# Altium PCB cree.PcbDoc
Units mil, origin at the board's own origin, x right, y up, seen from the top; angles counter-clockwise.
Board outline 1000 x 1000 mil, 2 copper layers (Top Layer, Bottom Layer); 16 components, 8 nets, 42 pads, 0 vias.
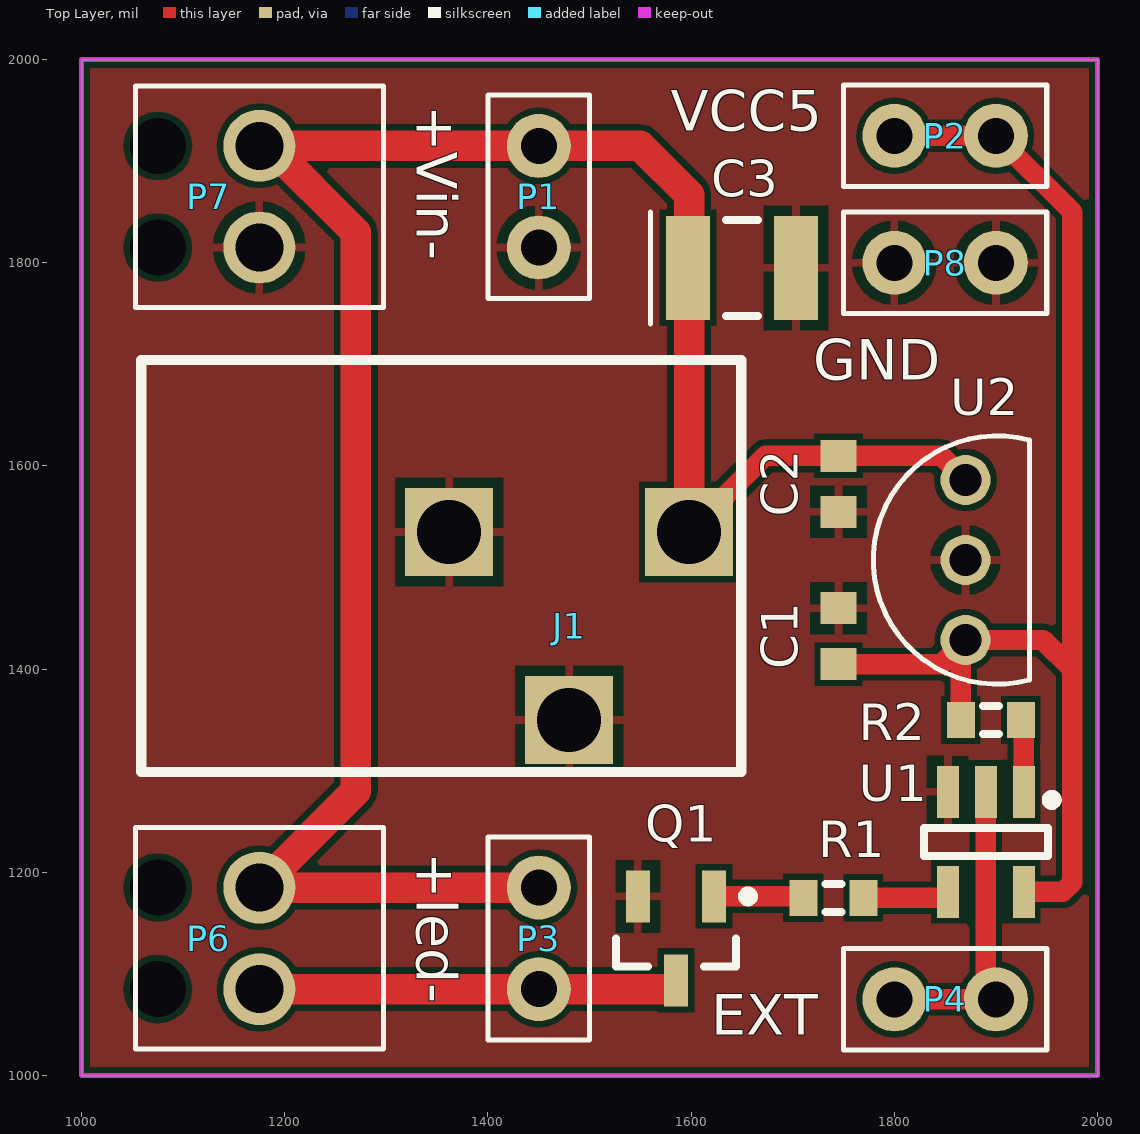
[diagram p0: Top Layer view]
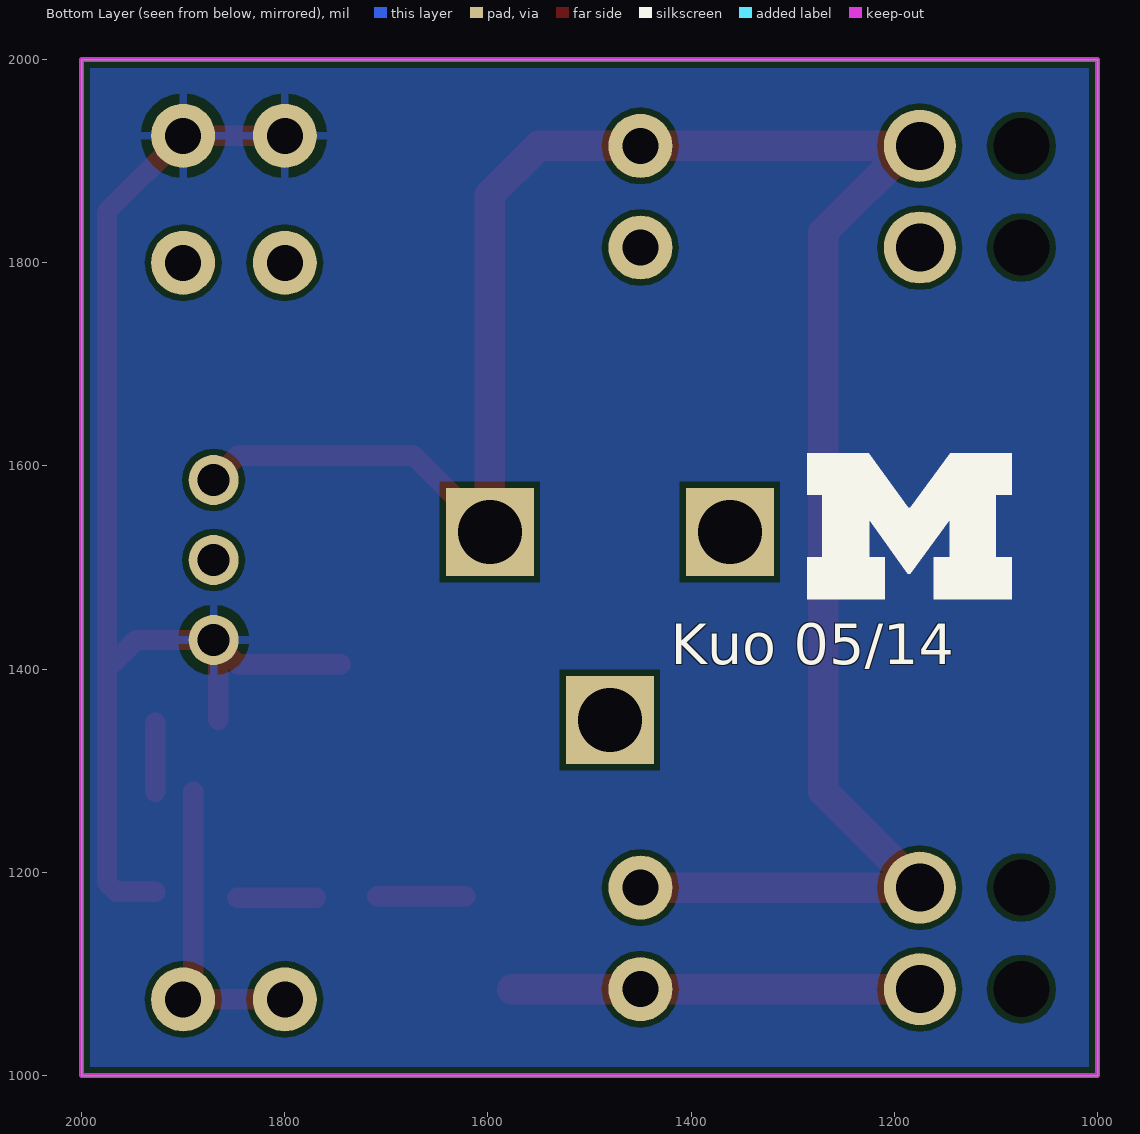
[diagram p1: Bottom Layer view, seen from below]

## Layer stack, top to bottom
Top Solder: solder mask 0.4, Solder Resist, Dk 3.5
Top Layer: signal copper 1.4
Dielectric 1: dielectric 12.6, FR-4, Dk 4.8
Bottom Layer: signal copper 1.4
Bottom Solder: solder mask 0.4, Solder Resist, Dk 3.5

## Board outline
1000,1000 1000,2000 2000,2000 2000,1000

## Design rules (kind name [scope] priority, off if disabled: settings)
Clearance "Clearance~Sunstone Circuits" [All] p1: gap=6 // Sunstone Circuits Minimum Clearance Rule (Double Sided)
HoleSize "HoleSize~Sunstone Circuits" [All] p1: absolutevalues=TRUE maxlimit=251 minlimit=16 maxpercent=80.000 minpercent=20.000 // SSC Hole Size Rule For Single Sided & Double Sided Designs.
HoleSize Testpoint [All] p2: absolutevalues=TRUE maxlimit=100 minlimit=1 maxpercent=80.000 minpercent=20.000
HoleSize TestPointUsage [All] p3: absolutevalues=TRUE maxlimit=100 minlimit=1 maxpercent=80.000 minpercent=20.000
MinimumAnnularRing "MinimumAnnularRing~Sunstone Circuits" [All] p1: minimumring=7 // Sunstone Circuits Minimum Annular Ring (Double Sided)
PlaneClearance "PlaneClearance~Sunstone Circuits" [All] p1: clearance=12 // Sunstone Circuits Power Plane Clearance Rule (Double Sided)
PlaneConnect "PlaneConnect~Sunstone Circuits" [All] p1: planeconnectstyle=Relief reliefexpansion=10 reliefentries=4 reliefconductorwidth=8 reliefairgap=10 // Sunstone Circuits Power Plane Connect Rule (Double Sided)
PolygonConnect "PolygonConnect~Sunstone Circuits" [All] p1: connectstyle=Relief reliefconductorwidth=8 reliefentries=4 polygonreliefangle="90 Angle" airgapwidth=10 // Sunstone Circuits Polygon Connect Style (Double Sided)
RoomDefinition cree_module [InComponentClass('cree_module')] p1: confinementstyle=ConfineIn formatcopy=TRUE lockcomponents=FALSE outline 1037.44,1013.44 1037.44,1986.56 1737.5,1986.56 1737.5,1987.5 1962.5,1987.5 1962.5,1320.71 1974.8,1320.71 1974.8,1139.29 1962.5,1139.29 1962.5,1012.5 1737.5,1012.5 1737.5,1013.44
RoutingVias "RoutingVias~Sunstone Circuits" [All] p1: holewidth=16 width=30 viastyle="Through Hole" minholewidth=16 minwidth=30 maxholewidth=20 maxwidth=40 // Sunstone Circuits Routing Vias Rule (Double Sided)
ShortCircuit "ShortCircuit~Sunstone Circuits" [All] p1: allowed=FALSE // Sunstone Circuits Short Circuit Rule~Do Not Allow (Double Sided)
SolderMaskExpansion "SolderMaskExpansion~Sunstone Circuits" [All] p1: expansion=3 // Sunstone Circuits Solder Mask Expansion Rule (Double Sided)
ViasUnderSMD "ViasUnderSMD~Sunstone Circuits" [All] p1: allowed=FALSE // Sunstone Circuits Vias Under SMD~Do Not Allow (Double Sided)
Width "Width~Sunstone Circuits" [All] p1: maxlimit=100 minlimit=6 preferedwidth=10 // Sunstone Circuits Minimum Width Rule (Double Sided)
25 further rules are at their usual default settings.

## Components (designator, comment, footprint, x,y, rotation, side; value= is the part's Value field where it differs from the comment)
C1 "Cap Semi" 1608[0603] 1745,1432.44 r270 top
C2 "Cap Semi" 1608[0603] 1745,1582.44 r90 top
C3 "Cap Semi" C1210 1650,1795 r180 top
J1 "PJ-102AH" PJ-102AH 1480,1535 r90 top
P1 "1 x 2 header" "1x2 header" 1450,1865 r270 top
P2 "1 x 2 header" "1x2 header" 1850,1925 r180 top
P3 "1 x 2 header" "1x2 header" 1450,1135 r90 top
P4 "1 x 2 header" "1x2 header" 1850,1075 r180 top
P6 "Screw connector" MPT_2position 1175,1135 r270 top
P7 "Screw connector" MPT_2position 1175,1865 r270 top
P8 "1 x 2 header" "1x2 header" 1850,1800 r180 top
Q1 "Si2312CDS" SOT95P250-3N 1585,1135 r270 top
R1 "Res3" J1-0603 1740,1175 r0 top
R2 "Res3" J1-0603 1895,1350 r180 top
U1 "SN74LVC1G126" SOT23-5 1890,1230 r270 top
U2 "LM78L05" TO92 1870,1507.44 r90 top

## Footprints (in the part's own frame and the unit in brackets; to place one, negate y for a bottom-side part, rotate by r counter-clockwise, add the part's x,y. Pads: shape width x height; smd on the part's side, far side on the other; paste and mask are expansions set on the pad)
"1x2 header" [mm] "1x2 header, 100 mils"
  round 1.6 hole 0.9: 1(-1.27,0) 2(1.27,0)
  silkscreen extent -2.54,-1.27 2.54,1.27, body extent -2.53,-1.26 2.53,1.26, height 8.38
1608[0603] [mm] "Chip Capacitor, Body 1.6x0.8mm, IPC High Density"
  rect 0.8x0.9 smd: 1(-0.7,0) 2(0.7,0)
  body extent -0.87,-0.48 0.87,0.48, height 1.3
C1210 [mm] "Chip Capacitor, Body 3.2x2.5mm, IPC High Density"
  rect 1.1x2.6 smd: 1(-1.35,0) 2(1.35,0)
  silkscreen extent -0.4,-1.2 0.4,1.2, body extent -1.7,-1.35 1.7,1.35, height 1.3
J1-0603 [mm] "Chip Resistor, Body 1.6x0.8mm, IPC High Density"
  rect 0.7x0.9 smd: 1(-0.75,0) 2(0.75,0)
  silkscreen extent -0.2,-0.35 0.2,0.35, body extent -0.85,-0.48 0.85,0.48, height 0.9
MPT_2position [mm] "Screw connector 2 pos"
  round 1.8 hole 1.2: 1(-1.27,0) 2(1.27,0)
  round 0 hole 1.4: ""(-1.27,-2.54) ""(1.27,-2.54)
  silkscreen extent -2.77,-3.1 2.77,3.1
PJ-102AH [mm] "Power Jack"
  rect 2.2x2.2 hole 1.6: 1(0,-3) 2(0,3) 3(-4.7,0)
  silkscreen extent -6,-4.3 4.3,10.7, body extent -5.75,-3.99 4.08,10.89, height 10
SOT23-5 [mm] "SOT23, 5-Leads, Body 2.9x1.6mm, Pitch 0.95mm, Lead Span 2.8mm, IPC High Density"
  rect 1.3x0.55 smd: 1(-1.25,0.95) 2(-1.25,0) 3(-1.25,-0.95) 4(1.25,-0.95) 5(1.25,0.95)
  silkscreen extent -1.17,-1.55 0.35,1.78, body extent -0.67,-1.5 0.65,1.5, height 1.45
SOT95P250-3N [mm] "SOT23, 3-Leads, Body 2.9x1.3mm, Pitch 0.95mm, Lead Span 2.3mm, IPC Medium Density"
  rect 1.3x0.6 smd: 1(-1.05,0.95) 2(-1.05,-0.95) 3(1.05,0)
  silkscreen extent -1.17,-1.5 0.7,1.93, body extent -0.7,-1.5 0.7,1.5, height 1.2
TO92 [mm]
  round 1.25 hole 0.8: 1(-2,0) 2(0,0) 3(2,0)
  silkscreen extent -3.1,-1.6 3.1,2.3

## Part data
C1 C2 C3: "Capacitor (Semiconductor SIM Model)"
J1: "CONN PWR JACK 2.1X5.5MM HIGH CUR"
P1 P2 P3 P4 P8: "100 mils standard header"
P6 P7: library part MPT_2POS, "Screw connector 2 positions"
Q1: "N-Channel 20 V (D-S) MOSFET"
R1 R2: "Resistor"
U1: "Single Bus Buffer Gate With 3-State Output"
U2: "LM78LXX Series 3-Terminal Positive Regulators"

## Nets (pads, with @x,y where several pads share a name; then routed paths per layer and width w, separated by ;. In a path a pad name is that pad's centre, name@x,y a point inside that pad or via, vN(x,y) a via of type N, cw(c..) or ccw(c..) an arc to the next point about the centre after c; other vN are vias at no path point)
GND: C1.1 C2.1 C3.1 J1.2 J1.3 P1.2 P7.2 P8.1 P8.2 Q1.2 U1.3 U2.2
NetP3_1: P3.1 P6.2 Q1.3 | length 401.3
  Top Layer w30: P6.2 P3.1 Q1.3@1576.34,1085
NetP4_1: P4.1 P4.2 U1.2 | length 294.2
  Top Layer w20: P4.2 P4.1 ; P4.1@1890,1085 U1.2
NetQ1_1: Q1.1 R1.1 | length 86.7
  Top Layer w20: Q1.1 R1.1@1709.13,1176.34
NetR1_2: R1.2 U1.4 | length 77.3
  Top Layer w20: R1.2 U1.4@1846.81,1175
NetR2_1: R2.1 U1.1 | length 67.9
  Top Layer w20: U1.1 R2.1@1927.4,1347.13
VCC5: C1.2 P2.1 P2.2 R2.2 U1.5 U2.1 | length 1237
  Top Layer w20: C1.2 1846.18,1404.88 1865.47,1424.17 R2.2 ; P2.2 P2.1 1975,1850 1975,1400 ; U2.1 1946.3,1428.7 1975,1400 ; U1.5 1965.79,1180.79 1975,1190 1975,1400
VIN: C2.2 C3.2 J1.1 P1.1 P3.2 P6.1 P7.1 U2.3 | length 2167.3
  Top Layer w20: J1.1 1673.11,1610 C2.2 1846.18,1610 U2.3
  Top Layer w30: P7.1 P7.1@1185,1915 ; P3.2 P6.1 1270,1280 1270,1830 P7.1@1185,1915 ; J1.1 1598.11,1866.89 1550,1915 P1.1 P7.1@1185,1915
pads on no net: P6. P7.

## Polygon pours and split planes (outlines as drawn)
VCC5 on Bottom Layer "Bottom Layer-No Net" (solid, pour order 2): 1000,1000 2000,1000 2000,2005 1000,2005
GND on Top Layer "Bottom Layer-No Net" (solid, pour order 4): 1000,1000 2000,1000 2000,2000 1000,2000

## Keep-outs
Keep-Out Layer:
  the board outline again, w5

## Silkscreen, mask and mechanical layers (free items; w line width, h text height)
Top Overlay:
  lines w5: 1560,1740 1560,1850
  text "+Vin-" at 1330,1955 h40 r270
  text "VCC5" at 1580,1930 h40
  text "GND" at 1720,1685 h40
  text "+led-" at 1330,1220 h40 r270
  text "EXT" at 1620,1040 h40
Bottom Overlay:
  region: 1285.96,1469.04 1209.23,1469.04 1209.23,1510 1224.84,1510 1224.84,1547.06 1186.8,1493.74 1184.2,1493.74 1145.51,1547.06 1145.51,1510 1161.12,1510 1161.12,1469.04 1084.4,1469.04 1084.4,1510 1100,1510 1100,1571.77 1084.4,1571.77 1084.4,1612.73 1145.19,1612.73 1184.2,1558.76 1186.15,1558.76 1225.16,1612.73 1285.96,1612.73 1285.96,1571.77 1271,1571.77 1271,1510 1285.96,1510
  text "Kuo 05/14" at 1420,1405 h40